# EAGLE board headlamp_v11-3 (EAGLE 6.4)
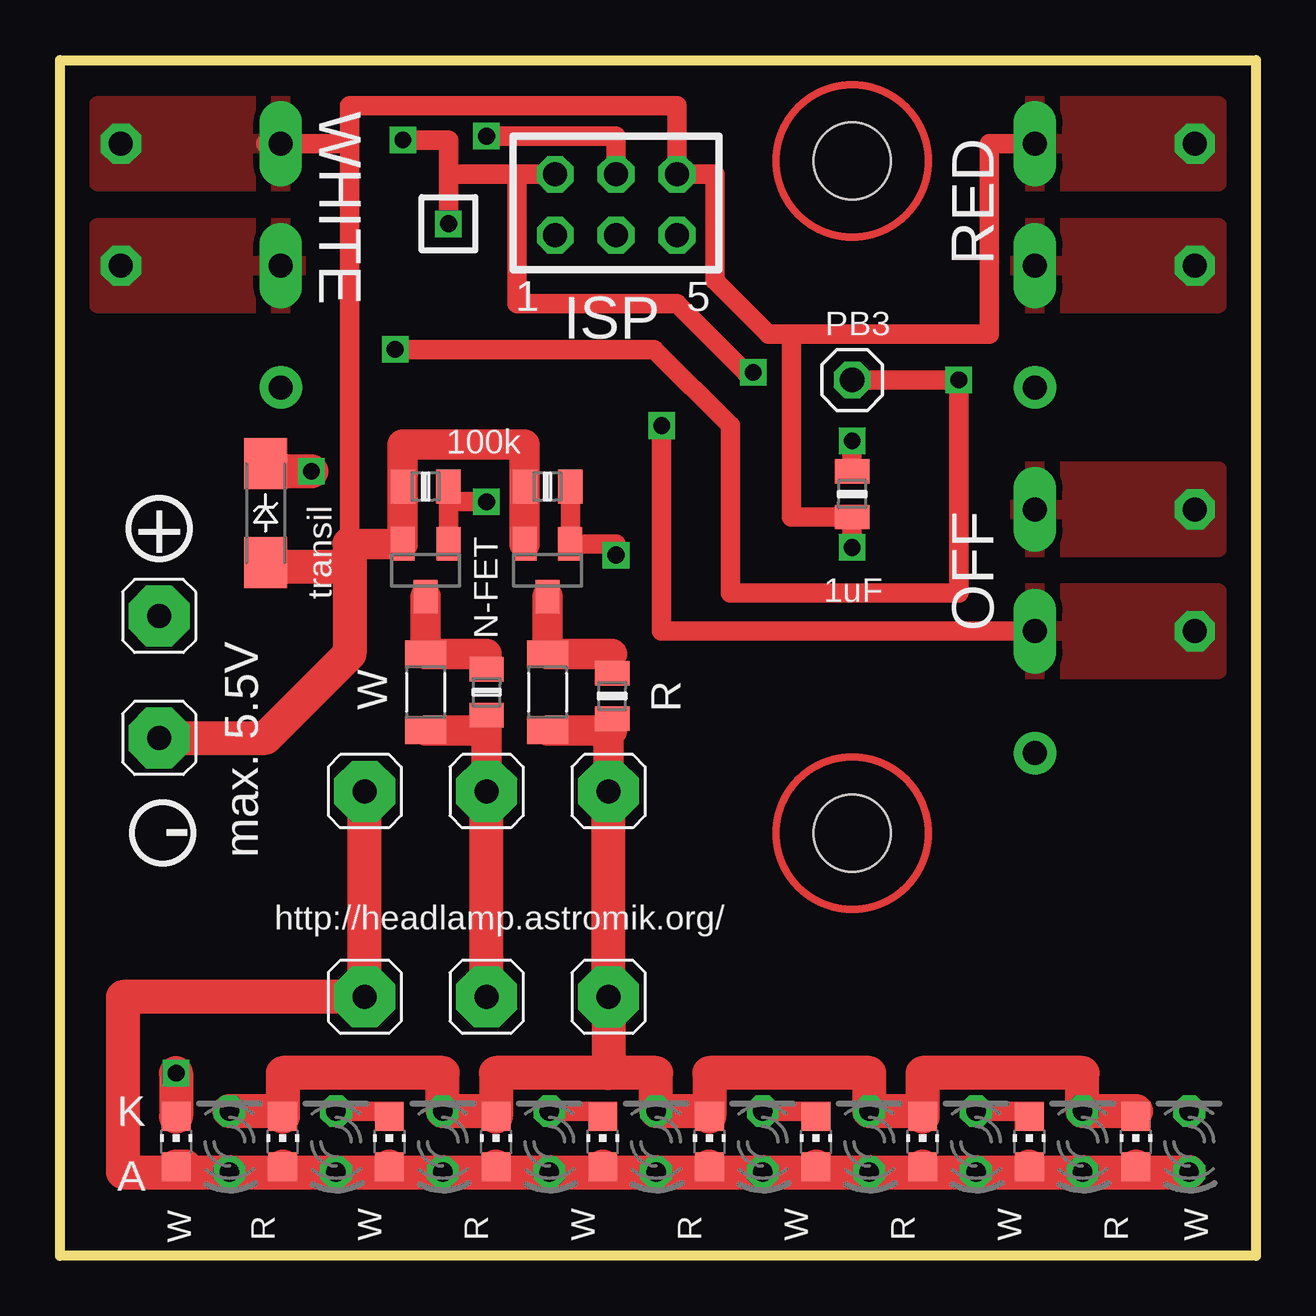
[diagram p0: board, top side]
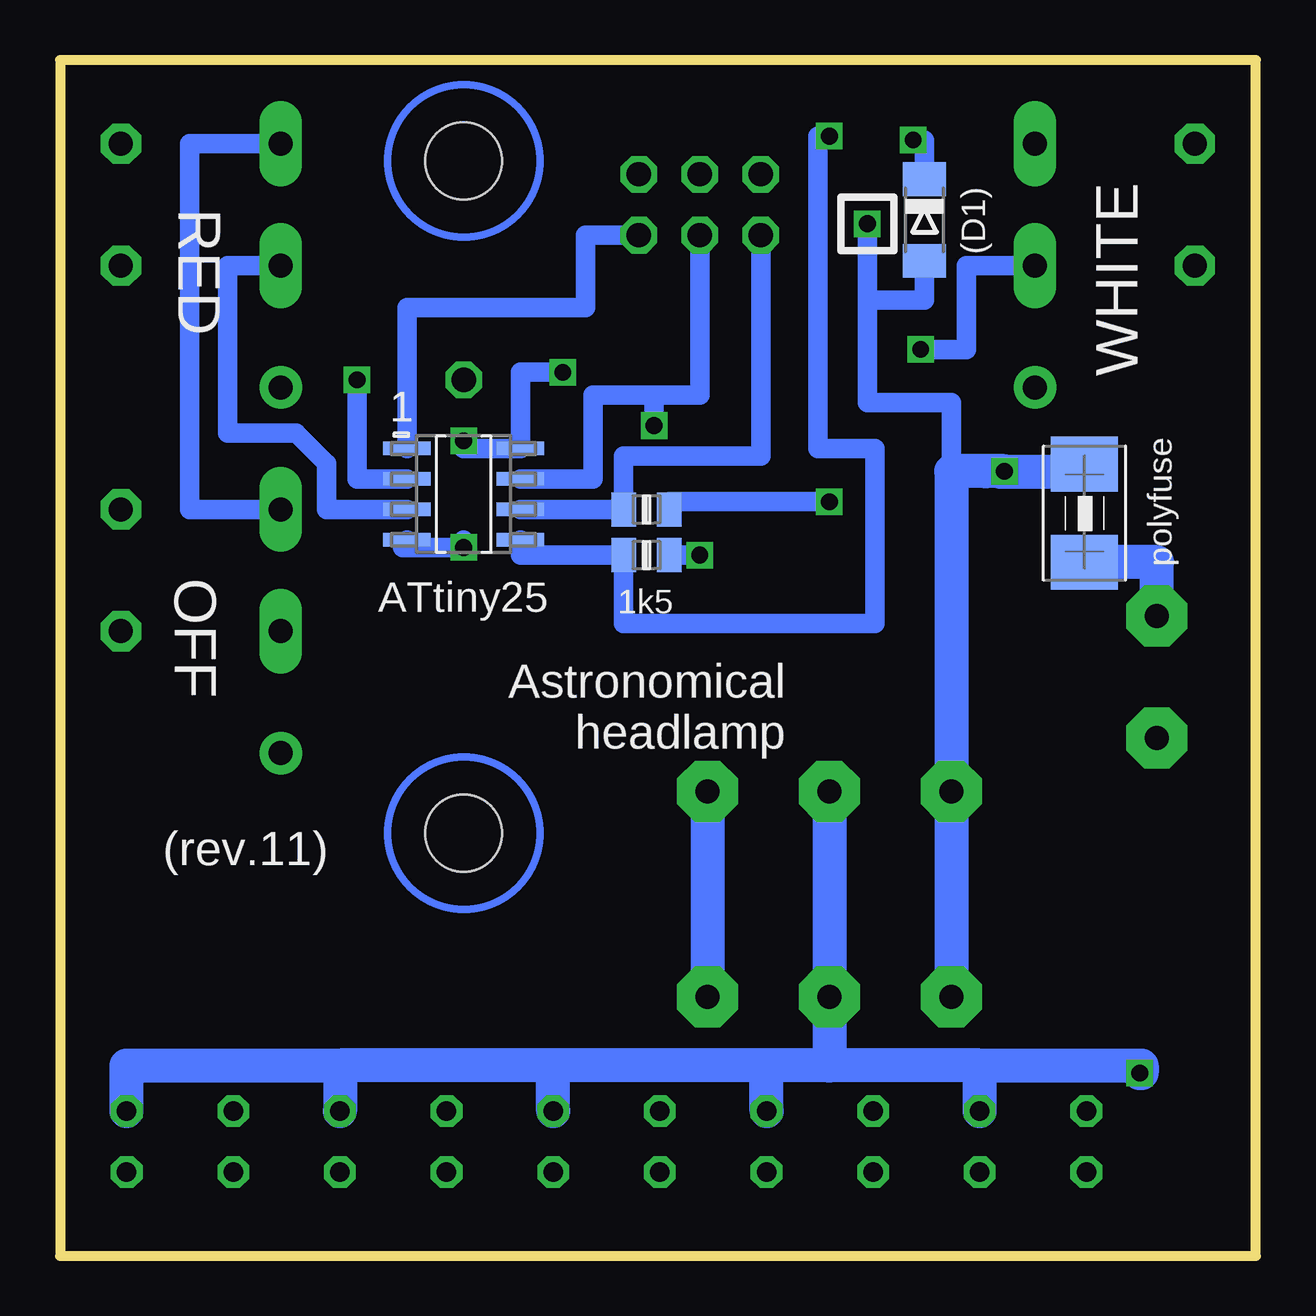
[diagram p1: board, bottom side, seen from below]

Size 49.85 x 49.85 mm. Coordinates in mm from the lower left corner, seen from the top.
Outline: 0,49.85 49.85,49.85 49.85,0 0,0 0,49.85
Copper layers (1*16): Top 0.035mm / dielectric 1.5mm / Bottom 0.035mm
Design rules "default *": minimum track width 10mil, minimum drill 24mil, track to track 8mil, track to pad 8mil, pad to pad 8mil, via to via 8mil, smd to smd 8mil, copper to edge 40mil, drill to drill 8mil, minimum pad ring 10mil, minimum via ring 8mil, stop-mask expansion 4mil, vias tented up to drill 0mil, thermal gap 10mil
Holes 3.2 mm at 33.02,17.62 33.02,45.64

## Footprints (pad centres in the part's own frame; a part is rotated, then mirrored left to right if it is on the bottom)
MINIMELF = smd 1.4 x 1.8: A 1.7,0; C -1.7,0
LED3MM = drill 0.813 octagon: A -1.27,0; K 1.27,0
S1G1_JUM = drill 1 pad 2.54 octagon: 1 0,0
0805 = smd 1.016 x 1.422: 1 -0.953,0; 2 0.953,0
2X03/90 = drill 1.016 octagon: 1 -2.54,-6.35; 2 -2.54,-3.81; 3 0,-6.35; 4 0,-3.81; 5 2.54,-6.35; 6 2.54,-3.81
CHIP-LED0805 = smd 1.2 x 1.2: A 0,-1.05; C 0,1.05
SOIC127P600X175-8N = smd 1.981 x 0.559: 1 -2.362,1.905; 2 -2.362,0.635; 3 -2.362,-0.635; 4 -2.362,-1.905; 5 2.362,-1.905; 6 2.362,-0.635; 7 2.362,0.635; 8 2.362,1.905
1X01 = drill 1.016 octagon: 1 0,0
1812 = smd 2.286 x 2.794: 1 -2.046,0; 2 2.046,0
SOT23 = smd 1 x 1.4: 1 -0.95,-1.1; 2 0.95,-1.1; 3 0,1.1
1206 = smd 1.143 x 1.702: 1 -1.587,0; 2 1.587,0
TLACITKO = drill 1 pad 1.778 long: P$1 -5.08,-6.35; P$2 0,-6.35 | drill 1 pad 1.778: P$3 5.08,-6.35
DO214AC+MINIMELF_BIDIR = smd 2.123 x 1.8: P$1 -2.064,0; P$2 2.064,0

## Placement (x,y rotation side)
(D1)  [MINIMELF]  13.81,43.18 270 bottom
ALT-LED-R1  [LED3MM]  42.62,4.76 90 top
ALT-LED-R2  [LED3MM]  33.73,4.76 90 top
ALT-LED-R3  [LED3MM]  24.84,4.76 90 top
ALT-LED-R4  [LED3MM]  15.95,4.76 90 top
ALT-LED-R5  [LED3MM]  7.06,4.76 90 top
ALT-LED-W6  [LED3MM]  38.18,4.76 90 top
ALT-LED-W7  [LED3MM]  29.29,4.76 90 top
ALT-LED-W8  [LED3MM]  20.4,4.76 90 top
ALT-LED-W9  [LED3MM]  11.51,4.76 90 top
ALT-LED-W10  [LED3MM]  47.07,4.76 90 top
BAT+  S1G1_JUMP  [S1G1_JUM]  4.13,26.67 0 top
BAT-  S1G1_JUMP  [S1G1_JUM]  4.13,21.59 0 top
C1  1uF  [0805]  33.02,31.75 270 top
JP1  [2X03/90]  23.18,48.9 0 top
LED-R1  [CHIP-LED0805]  44.85,4.76 0 top
LED-R2  [CHIP-LED0805]  35.96,4.76 0 top
LED-R3  [CHIP-LED0805]  27.07,4.76 0 top
LED-R4  [CHIP-LED0805]  18.18,4.76 0 top
LED-R5  [CHIP-LED0805]  9.29,4.76 0 top
LED-W6  [CHIP-LED0805]  40.4,4.76 0 top
LED-W7  [CHIP-LED0805]  31.51,4.76 0 top
LED-W8  [CHIP-LED0805]  22.62,4.76 0 top
LED-W9  [CHIP-LED0805]  13.73,4.76 0 top
LED-W10  [CHIP-LED0805]  4.84,4.76 0 top
MCU1  ATTINY25  [SOIC127P600X175-8N]  33.02,31.75 0 bottom
PB3  [1X01]  33.02,36.51 0 top
POLYFUSE  [1812]  7.14,30.96 90 bottom
PROP1A  S1G1_JUMP  [S1G1_JUM]  12.7,19.37 0 top
PROP1B  S1G1_JUMP  [S1G1_JUM]  12.7,10.79 0 top
PROP2A  S1G1_JUMP  [S1G1_JUM]  22.86,19.37 0 top
PROP2B  S1G1_JUMP  [S1G1_JUM]  22.86,10.79 0 top
PROP3A  S1G1_JUMP  [S1G1_JUM]  17.78,19.37 0 top
PROP3B  S1G1_JUMP  [S1G1_JUM]  17.78,10.79 0 top
Q1  FDV301N  [SOT23]  20.32,28.57 180 top
Q2  FDV301N  [SOT23]  15.24,28.57 180 top
R1  [1206]  20.32,23.5 270 top
R1'  [0805]  23.02,23.34 90 top
R2  1k5  [0805]  25.4,29.21 0 bottom
R3  [1206]  15.24,23.5 270 top
R3'  [0805]  17.78,23.5 90 top
R4  1k5  [0805]  25.4,31.11 0 bottom
R5  100k  [0805]  15.24,32.07 0 top
R6  100k  [0805]  20.32,32.07 0 top
TLAC1  TLACITKO  [TLACITKO]  46.99,41.27 270 top
TLAC2  TLACITKO  [TLACITKO]  2.86,41.27 270 bottom
TLAC3  TLACITKO  [TLACITKO]  46.99,26.04 270 top
TR1  Transil 6V  [DO214AC+MINIMELF_BIDIR]  8.57,30.96 270 top

## Library data of the parts
(D1) = diode
ALT-LED-R1-ALT-LED-R5 ALT-LED-W6-ALT-LED-W10 LED-R1-LED-R5 LED-W6-LED-W10 = led
BAT+ BAT- PROP1A PROP1B PROP2A PROP2B PROP3A PROP3B = sirsi_pin
C1 R1' R2 R3' R4-R6 = #PaJa_30
JP1 PB3 = pinhead
MCU1 = ATTiny-SOIC8; PACKAGE: SOIC-8
POLYFUSE = adafruit
Q1 Q2 = transistor-small-signal
R1 R3 = #PaJa_31
TLAC1-TLAC3 = tlacitko-L
TR1 = transil

## Nets
+BAT: BAT+.1 POLYFUSE.1
GND: BAT-.1 C1.2 JP1.6 MCU1.4 Q1.2 Q2.2 R5.1 R6.1 TLAC1.P$1 TLAC2.P$1 TLAC3.P$1 TR1.P$2
RED-DRAIN: Q1.3 R1'.2 R1.1
RED-KAT: ALT-LED-R1.K ALT-LED-R2.K ALT-LED-R3.K ALT-LED-R4.K ALT-LED-R5.K LED-R1.C LED-R2.C LED-R3.C LED-R4.C LED-R5.C PROP2A.1 PROP2B.1 R1'.1 R1.2
RED/GATE: Q1.1 R2.2 R6.2
TINY/PB0: JP1.4 MCU1.5 R2.1
TINY/PB1: JP1.1 MCU1.6 R4.1
TINY/PB2: JP1.3 MCU1.7 TLAC3.P$2
TINY/PB3: MCU1.2 PB3.1 TLAC2.P$2
TINY/PB4: MCU1.3 TLAC1.P$2
TINY/PB5: JP1.5 MCU1.1
VCC: (D1).A (D1).C ALT-LED-R1.A ALT-LED-R2.A ALT-LED-R3.A ALT-LED-R4.A ALT-LED-R5.A ALT-LED-W6.A ALT-LED-W7.A ALT-LED-W8.A ALT-LED-W9.A ALT-LED-W10.A C1.1 JP1.2 LED-R1.A LED-R2.A LED-R3.A LED-R4.A LED-R5.A LED-W6.A LED-W7.A LED-W8.A LED-W9.A LED-W10.A MCU1.8 POLYFUSE.2 PROP1A.1 PROP1B.1 TR1.P$1
WHITE-DRAIN: Q2.3 R3'.2 R3.1
WHITE-KAT: ALT-LED-W6.K ALT-LED-W7.K ALT-LED-W8.K ALT-LED-W9.K ALT-LED-W10.K LED-W6.C LED-W7.C LED-W8.C LED-W9.C LED-W10.C PROP3A.1 PROP3B.1 R3'.1 R3.2
WHITE/GATE: Q2.1 R4.2 R5.2

## Tracks (layer width: path | path; a pad name or v marks a point on that pad's centre or on a via)
+BAT
  Bottom 1.422: BAT+.1 4.13,28.91 POLYFUSE.1
GND  (via drill 0.7, 1 pad 1.68)
  Top 0.813: Q2.2 | Q1.2 | v33.02,29.53 C1.2 30.48,30.8 30.48,38.42 | 12.06,29.68 12.06,46.35 | 30.48,38.42 38.73,38.42 38.73,46.35 TLAC1.P$1 | 8.57,46.35 TLAC2.P$1 12.06,46.35 | 12.06,46.35 12.06,47.94 25.72,47.94 JP1.6 27.3,45.09 27.3,40.64 29.53,38.42 30.48,38.42 | TR1.P$2 8.57,28.73
  Top 1.27: Q2.2 R5.1 14.29,33.81 19.37,33.81 R6.1 Q1.2 | Q2.2 12.06,29.68
  Top 1.422: 12.06,29.68 12.06,28.73 | 12.06,28.73 12.06,25.08 8.57,21.59 BAT-.1 | 8.57,28.73 12.06,28.73
  Bottom 0.813: 33.02,29.84 v33.02,29.53 35.38,29.53 | MCU1.4 35.38,29.53 | 35.38,29.53 35.56,29.53 | TLAC3.P$1 44.45,31.11 44.45,46.35 TLAC1.P$1
  other vias: 2.54,46.35 47.31,31.11 47.31,46.35
  pour Top: 9.84,44.77 1.59,44.77 1.59,47.94 9.84,47.94
  pour Top: 48.26,44.77 40.01,44.77 40.01,47.94 48.26,47.94
  pour Top: 48.26,29.53 40.01,29.53 40.01,32.7 48.26,32.7
RED-DRAIN
  Top 0.813: 23.02,25.08 R1'.2
  Top 1.27: Q1.3 R1.1 23.02,25.08
RED-KAT
  Top 0.813: LED-R1.C 44.85,6.03 | LED-R2.C 35.96,6.03 | LED-R3.C 27.07,6.03 | LED-R4.C 18.18,6.03 | LED-R5.C 9.29,6.03 | R1.2 22.86,21.91 | 23.02,21.91 R1'.1
  Top 1.27: 22.86,21.91 PROP2A.1 | R1.2 23.02,21.91
  Top 1.422: 44.85,6.03 ALT-LED-R1.K 42.62,7.62 35.96,7.62 LED-R2.C | 35.96,6.03 ALT-LED-R2.K 33.73,7.62 27.07,7.62 LED-R3.C | 27.07,6.03 ALT-LED-R3.K 24.84,7.62 22.86,7.62 | 22.86,7.62 18.18,7.62 LED-R4.C | 18.18,6.03 ALT-LED-R4.K 15.95,7.62 9.29,7.62 LED-R5.C | 9.29,6.03 ALT-LED-R5.K | 22.86,7.62 PROP2B.1 PROP2A.1
  Bottom 1.422: PROP2A.1 PROP2B.1
RED/GATE  (via drill 0.7)
  Top 0.813: R6.2 Q1.1 23.18,29.68 v23.18,29.21
  Bottom 0.813: R2.2 v23.18,29.21
TINY/PB0  (via drill 0.7)
  Top 0.813: v17.78,46.67 23.18,46.67 JP1.4
  Bottom 0.813: v17.78,46.67 18.26,46.67 18.26,33.66 15.88,33.66 15.88,26.35 26.35,26.35 R2.1 30.66,29.21 MCU1.5
TINY/PB1
  Bottom 0.813: JP1.1 20.64,33.34 26.35,33.34 R4.1 MCU1.6
TINY/PB2  (via drill 0.7, 1 pad 1.68)
  Top 0.813: TLAC3.P$2 25.08,26.04 v25.08,34.61
  Bottom 0.813: JP1.3 23.18,35.88 25.08,35.88 | 25.08,35.88 27.62,35.88 27.62,32.38 MCU1.7 | v25.08,34.61 25.08,35.88
  other vias: 47.31,26.04
  pour Top: 48.26,24.45 40.01,24.45 40.01,27.62 48.26,27.62
TINY/PB3  (via drill 0.7, 1 pad 1.68)
  Top 0.813: v13.97,37.78 24.77,37.78 27.94,34.61 27.94,27.62 37.47,27.62 v37.47,36.51 PB3.1
  Bottom 0.813: MCU1.2 37.47,32.38 v37.47,36.51 | TLAC2.P$2 12.06,41.27 12.06,37.78 v13.97,37.78
  other vias: 2.54,41.27
  pour Top: 9.84,42.86 1.59,42.86 1.59,39.69 9.84,39.69
TINY/PB4  (via drill 1 pad 1.68)
  Bottom 0.813: MCU1.3 38.73,31.11 38.73,33.02 40.01,34.29 42.86,34.29 42.86,41.27 TLAC1.P$2
  other vias: 47.31,41.27
  pour Top: 48.26,39.69 40.01,39.69 40.01,42.86 48.26,42.86
TINY/PB5
  Bottom 0.813: JP1.5 27.94,42.55 27.94,39.53 35.38,39.53 MCU1.1
VCC  (via drill 0.7)
  Top 0.813: C1.1 v33.02,33.97 | v28.89,36.83 28.57,36.83 25.72,39.69 19.05,39.69 19.05,45.09 JP1.2 16.19,45.09 | 16.19,45.09 v16.19,43.02 | v14.29,46.51 16.19,46.51 16.19,45.09 | TR1.P$1 8.57,32.7
  Top 1.422: 5.22,3.49 ALT-LED-R5.A 9.29,3.49 | LED-R5.A 9.29,3.49 | 9.29,3.49 ALT-LED-W9.A 13.73,3.49 | LED-W9.A 13.73,3.49 | 13.73,3.49 ALT-LED-R4.A 18.18,3.49 | LED-R4.A 18.18,3.49 | 18.18,3.49 ALT-LED-W8.A 22.62,3.49 | LED-W8.A 22.62,3.49 | 22.62,3.49 ALT-LED-R3.A 27.07,3.49 | LED-R3.A 27.07,3.49 | 27.07,3.49 ALT-LED-W7.A 31.51,3.49 | LED-W7.A 31.51,3.49 | 31.51,3.49 ALT-LED-R2.A 35.96,3.49 | LED-R2.A 35.96,3.49 | 35.96,3.49 ALT-LED-W6.A ALT-LED-R1.A | LED-W6.A 40.4,3.49 ALT-LED-R1.A | ALT-LED-R1.A 44.85,3.49 | 44.85,3.49 LED-R1.A | PROP1A.1 PROP1B.1 2.62,10.79 2.62,3.49 5.22,3.49 | 44.85,3.49 ALT-LED-W10.A | 5.22,3.49 5.22,3.71 LED-W10.A | 8.57,32.7 v10.48,32.7
  Bottom 0.813: 16.19,39.85 16.19,35.56 12.7,35.56 12.7,32.7 | 16.19,39.85 v16.19,43.02 | v33.02,33.97 33.02,33.66 MCU1.8 30.66,36.83 v28.89,36.83 | (D1).A 13.81,39.85 16.19,39.85 | (D1).C 13.81,46.51 v14.29,46.51 | 7.14,32.69 POLYFUSE.2
  Bottom 1.27: 11.27,32.7 10.64,32.7 10.64,32.69
  Bottom 1.422: v10.48,32.7 11.27,32.7 12.7,32.7 PROP1A.1 PROP1B.1 | 10.64,32.69 7.14,32.69
WHITE-DRAIN
  Top 0.813: 17.78,25.08 R3'.2
  Top 1.27: Q2.3 R3.1 17.78,25.08
WHITE-KAT  (via drill 0.7)
  Top 0.813: LED-W6.C 40.4,6.03 ALT-LED-W6.K | LED-W7.C 31.51,6.03 ALT-LED-W7.K | LED-W8.C 22.62,6.03 ALT-LED-W8.K | LED-W9.C 13.73,6.03 ALT-LED-W9.K | LED-W10.C 4.84,6.03 | 17.78,21.91 R3'.1
  Top 1.27: PROP3A.1 17.78,21.91 R3.2
  Top 1.422: PROP3B.1 PROP3A.1 | v4.84,7.62 LED-W10.C
  Bottom 1.422: 11.51,7.94 17.78,7.94 | 17.78,7.94 20.4,7.94 | ALT-LED-W8.K 20.4,7.94 | 20.4,7.94 29.29,7.94 | ALT-LED-W7.K 29.29,7.94 | 29.29,7.94 38.18,7.94 | 38.18,7.94 ALT-LED-W6.K | PROP3A.1 PROP3B.1 17.78,7.94 | ALT-LED-W9.K 11.51,7.94 | 11.51,7.94 4.76,7.94 4.76,7.62 v4.84,7.62 | ALT-LED-W10.K 47.07,7.94 38.18,7.94
WHITE/GATE  (via drill 0.7)
  Top 0.813: Q2.1 16.19,31.43 | 16.19,31.43 R5.2 | v17.78,31.43 16.19,31.43
  Bottom 0.813: R4.2 24.45,31.43 v17.78,31.43
(copper drawn outside any net)
  shapes: Bottom circle x2, Top circle x2

## Text on the board
tPlace: WHITE | RED | ISP | 1 | 5 | PB3 | 100k | transil | OFF | + | 1uF | N-FET | W | R | - | max. 5.5V | http://headlamp.astromik.org/ | K | A | W | R | W | R | W | R | W | R | W | R | W
bPlace: RED | (D1) | WHITE | 1 | polyfuse | 1k5 | OFF | ATtiny25 | Astronomical / headlamp | (rev.11)